# EAGLE board RBNSpyBox - V1_0 (EAGLE 9.3.0)
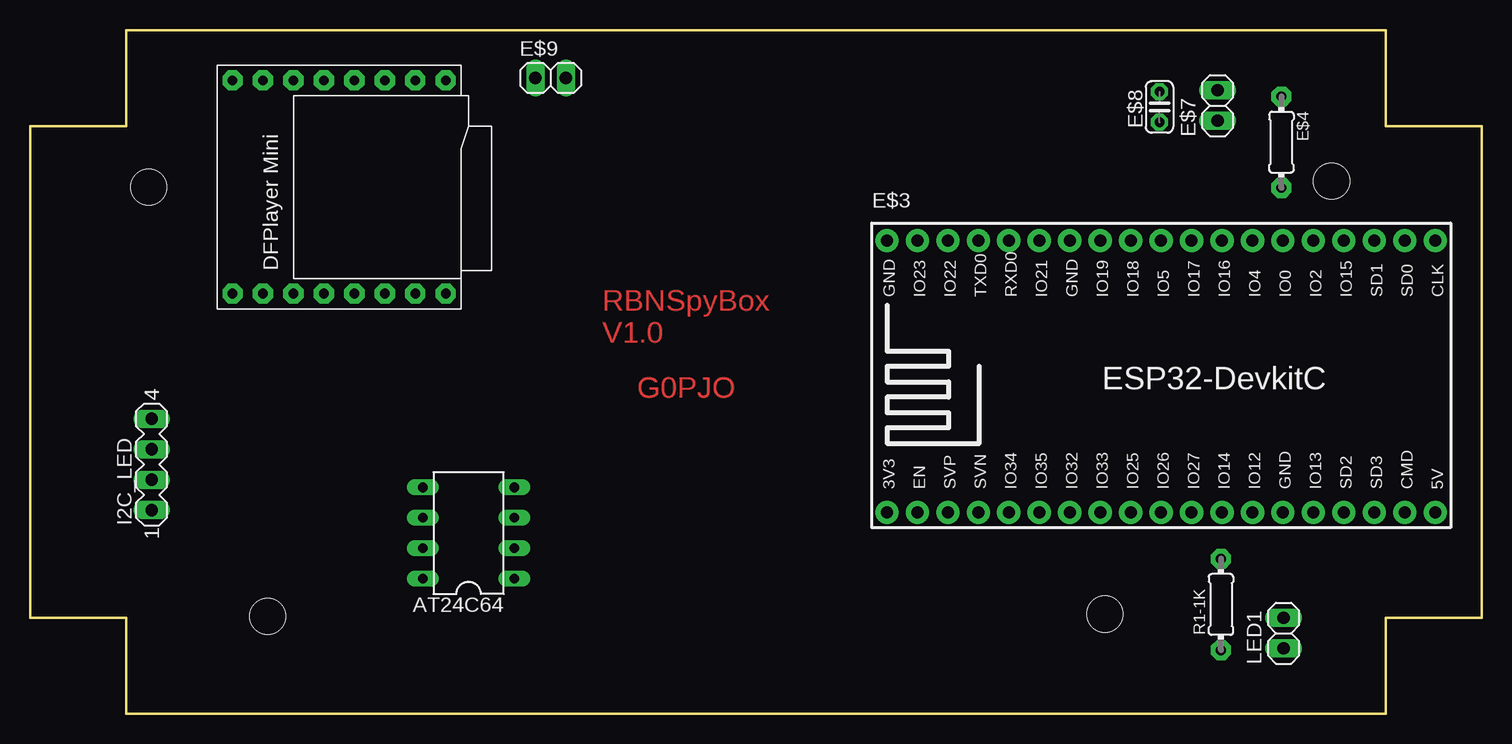
[diagram p0: board, top side]
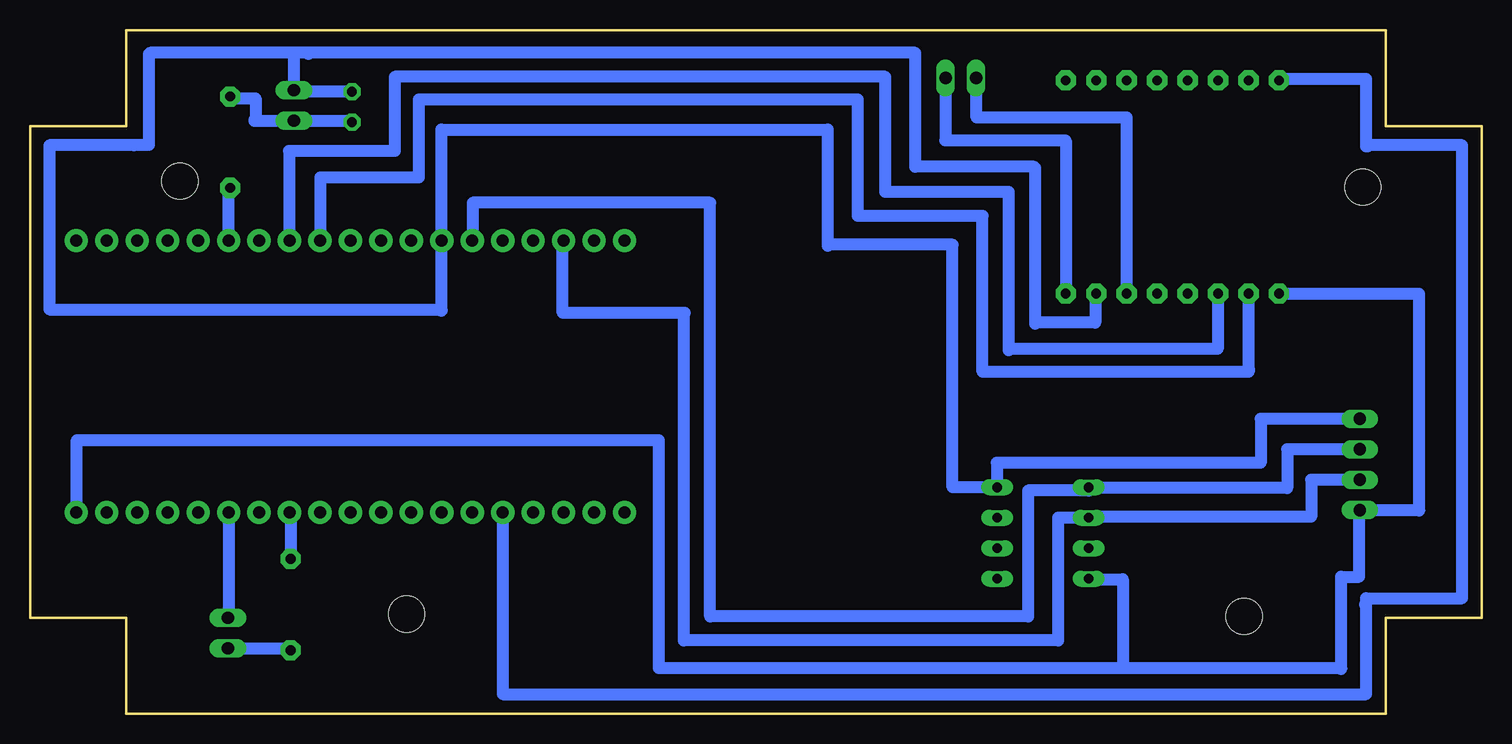
[diagram p1: board, bottom side, seen from below]

Size 121 x 57 mm. Coordinates in mm from the lower left corner, seen from the top.
Outline: 8,0 113,0 113,8 121,8 121,49 113,49 113,57 8,57 8,49 0,49 0,8 8,8 8,0
Copper layers (1*16): Top 0.035mm / dielectric 1.5mm / Bottom 0.035mm
Design rules "default": minimum track width 6mil, minimum drill 0.35mm, track to track 6mil, track to pad 6mil, pad to pad 6mil, via to via 6mil, smd to smd 6mil, copper to edge 40mil, drill to drill 6mil, minimum pad ring 10mil, minimum via ring 8mil, stop-mask expansion 4mil, vias tented up to drill 0mil, thermal gap 10mil
Holes 3 mm at 108.5,44.4 9.9,43.9 89.6,8.3 19.8,8.1

## Footprints (pad centres in the part's own frame; a part is rotated, then mirrored left to right if it is on the bottom)
DIL08 = drill 0.813 long: 1 -3.81,-3.81; 2 -1.27,-3.81; 3 1.27,-3.81; 4 3.81,-3.81; 5 3.81,3.81; 6 1.27,3.81; 7 -1.27,3.81; 8 -3.81,3.81
DFPLAYER = drill 0.8 pad 1.676 octagon: ADKEY1 8.89,-1.27; ADKEY2 8.89,1.27; BUSY 8.89,8.89; DAC_L -8.89,-1.27; DAC_R -8.89,1.27; GND_1 -8.89,-6.35; GND_2 8.89,-6.35; IO1 8.89,-8.89; IO2 8.89,-3.81; RX -8.89,6.35; SPK1 -8.89,-3.81; SPK2 -8.89,-8.89; TX -8.89,3.81; USB+ 8.89,3.81; USB- 8.89,6.35; VCC -8.89,8.89
ESP32-DEVKITC = drill 1 pad 1.93: 1 -22.87,-11.42; 2 -20.33,-11.42; 3 -17.79,-11.42; 4 -15.25,-11.42; 5 -12.71,-11.42; 6 -10.17,-11.42; 7 -7.63,-11.42; 8 -5.09,-11.42; 9 -2.55,-11.42; 10 -0.01,-11.42; 11 2.53,-11.42; 12 5.07,-11.42; 13 7.61,-11.42; 14 10.15,-11.42; 15 12.69,-11.42; 16 15.23,-11.42; 17 17.77,-11.42; 18 20.31,-11.42; 19 22.85,-11.42; 20 22.85,11.23; 21 20.31,11.23; 22 17.77,11.23; 23 15.23,11.23; 24 12.69,11.23; 25 10.15,11.23; 26 7.61,11.23; 27 5.07,11.23; 28 2.53,11.23; 29 -0.01,11.23; 30 -2.55,11.23; 31 -5.09,11.23; 32 -7.63,11.23; 33 -10.17,11.23; 34 -12.71,11.23; 35 -15.25,11.23; 36 -17.79,11.23; 37 -20.33,11.23; 38 -22.87,11.23
0204/7 = drill 0.813 pad 1.676 octagon: 1 -3.81,0; 2 3.81,0
1X02 = drill 1.016 long: 1 -1.27,0; 2 1.27,0
C025-024X044 = drill 0.813 pad 1.422 octagon: 1 -1.27,0; 2 1.27,0
MA04-1 = drill 1.016 long: 1 -3.81,0; 2 -1.27,0; 3 1.27,0; 4 3.81,0

## Placement (x,y rotation side)
AT24C64  [DIL08]  36.56,15.05 90 top
E$1  [DFPLAYER]  25.77,43.91 90 top
E$3  [ESP32-DEVKITC]  94.3,28.2 0 top
E$4  [0204/7]  104.32,47.64 270 top
E$7  [1X02]  99,50.7 90 top
E$8  [C025-024X044]  94.16,50.58 90 top
E$9  [1X02]  43.4,53 0 top
I2C_LED  [MA04-1]  10.14,20.77 90 top
LED1  [1X02]  104.5,6.7 90 top
R1-1K  [0204/7]  99.28,9.09 90 top

## Library data of the parts
AT24C64 E$4 E$8 R1-1K = adafruit
E$1 = DFPlayer_v1
E$3 = ESP32-DEVKITC
E$7 E$9 LED1 = pinhead
I2C_LED = con-lstb

## Nets
DFPLAYER-BUSY: E$1.BUSY E$3.5
ESP32-RX: E$1.TX E$3.27
ESP32-TX: E$1.RX E$3.28
GND: AT24C64.4 E$1.GND_1 E$3.32 E$7.2 E$8.2 I2C_LED.4
S$1: E$3.12 R1-1K.2
S$3: E$1.SPK1 E$9.1
S$7: E$3.25 E$4.2
S$12: E$1.SPK2 E$9.2
S$14: E$3.26
S$20: LED1.1 R1-1K.1
S$21: E$3.14 LED1.2
S$22: E$4.1 E$7.1 E$8.1
SCL: AT24C64.6 E$3.36 I2C_LED.2
SDA: AT24C64.5 E$3.33 I2C_LED.3
V5: AT24C64.8 E$1.VCC E$3.19 I2C_LED.1

## Tracks (layer width: path | path; a pad name or v marks a point on that pad's centre or on a via)
DFPLAYER-BUSY
  Bottom 1.016: E$3.5 81.59,1.63 81.6,1.62 9.62,1.62 9.62,9.02 | 9.62,9.02 9.7,9.1 | 9.62,9.02 9.62,9.62 1.62,9.62 1.62,47.38 9.5,47.38 9.5,47.3 9.62,47.3 9.62,52.9 16.88,52.9 E$1.BUSY
ESP32-RX
  Bottom 1.016: E$1.TX 22,35.02 22,30.4 39.4,30.4 | 39.4,30.4 39.4,30.3 | 39.4,30.4 39.4,43.5 49.7,43.5 49.7,53.1 90.6,53.1 90.6,46.9 99.4,46.9 99.4,39.43 E$3.27
ESP32-TX
  Bottom 1.016: E$1.RX 19.42,28.8 19.4,28.8 19.4,28.5 41.6,28.5 41.6,41.5 52,41.5 52,51.2 88.6,51.2 88.6,44.7 96.8,44.7 96.8,39.43 E$3.28
GND
  Bottom 1.016: E$1.GND_1 32.2,34.94 32.2,32.6 37.1,32.6 37.2,32.5 37.2,45.5 37.3,45.6 47.2,45.6 47.2,55.1 97.9,55.1 | 97.9,55.1 99,55.1 | 99,55.1 111,55.1 111.1,55 111.1,47.4 112.3,47.4 112.33,47.38 119.38,47.38 119.38,33.7 86.8,33.7 86.7,33.6 86.67,33.63 E$3.32 86.7,39.43 86.7,48.7 54.5,48.7 54.5,39.1 | 97.8,55 97.9,55.1 | 99,55.1 E$7.2 99,51.85 E$8.2 | 54.5,39.1 44.1,39.1 44.1,18.86 AT24C64.4 40.4,18.86 40.4,20.9 18.4,20.9 18.4,24.58 I2C_LED.4 | 54.5,39.1 54.5,39
S$1
  Bottom 0.2: R1-1K.2 99.37,12.99
  Bottom 1.016: E$3.12 99.28,16.69 R1-1K.2
S$3
  Bottom 1.016: E$1.SPK1 29.58,49.68 29.6,49.7 42.1,49.7 42.1,52.97 E$9.1
S$7
  Bottom 1.016: E$3.25 104.45,43.83 E$4.2
S$12
  Bottom 1.016: E$9.2 44.67,47.83 44.7,47.8 34.7,47.8 34.66,47.76 E$1.SPK2
S$20
  Bottom 0.2: LED1.1 104.35,5.28
  Bottom 1.016: LED1.1 99.43,5.43 R1-1K.1
S$21
  Bottom 0.2: E$3.14 104.5,16.73
  Bottom 1.016: E$3.14 104.45,8.02 LED1.2
S$22
  Bottom 1.016: E$4.1 104.32,51.3 102.2,51.3 102.2,49.5 102.3,49.5 102.3,49.43 E$7.1 94.16,49.43 E$8.1
SCL
  Bottom 1.016: I2C_LED.2 14.2,19.5 14.2,16.4 32.75,16.4 AT24C64.6 35.3,16.32 35.3,6.1 66.5,6.1 66.5,33.4 | 66.5,33.4 66.4,33.4 | 66.5,33.4 76.6,33.4 76.6,39.43 E$3.36
SDA
  Bottom 1.016: I2C_LED.3 16.2,22.04 16.2,18.8 32.75,18.8 AT24C64.5 32.75,18.6 37.8,18.6 37.8,8.1 64.3,8.1 64.3,42.6 84.1,42.6 84.1,39.43 E$3.33
V5
  Bottom 1.016: E$3.19 117.1,16.78 117.1,22.8 68.6,22.8 68.6,3.8 29.9,3.8 | 29.9,3.8 11.7,3.8 | 11.7,3.8 11.7,3.7 | 11.7,3.8 11.7,11.4 10.2,11.4 10.2,16.96 I2C_LED.1 5.2,16.96 | 5.2,16.96 5.2,16.9 | 5.2,16.96 5.2,35 16.88,35 E$1.VCC | AT24C64.8 32.75,11.2 29.9,11.2 29.9,3.8

## Text on the board
Top: RBNSpyBox / V1.0 | G0PJO